# Altium PCB PCB_TKeyboard_2021-06-17.pcbdoc
Units mil, origin at the board's own origin, x right, y up, seen from the top; angles counter-clockwise.
Board outline 6275 x 6995 mil, 2 copper layers (Top Layer, Bottom Layer); 30 components, 31 nets, 91 pads, 11 vias.
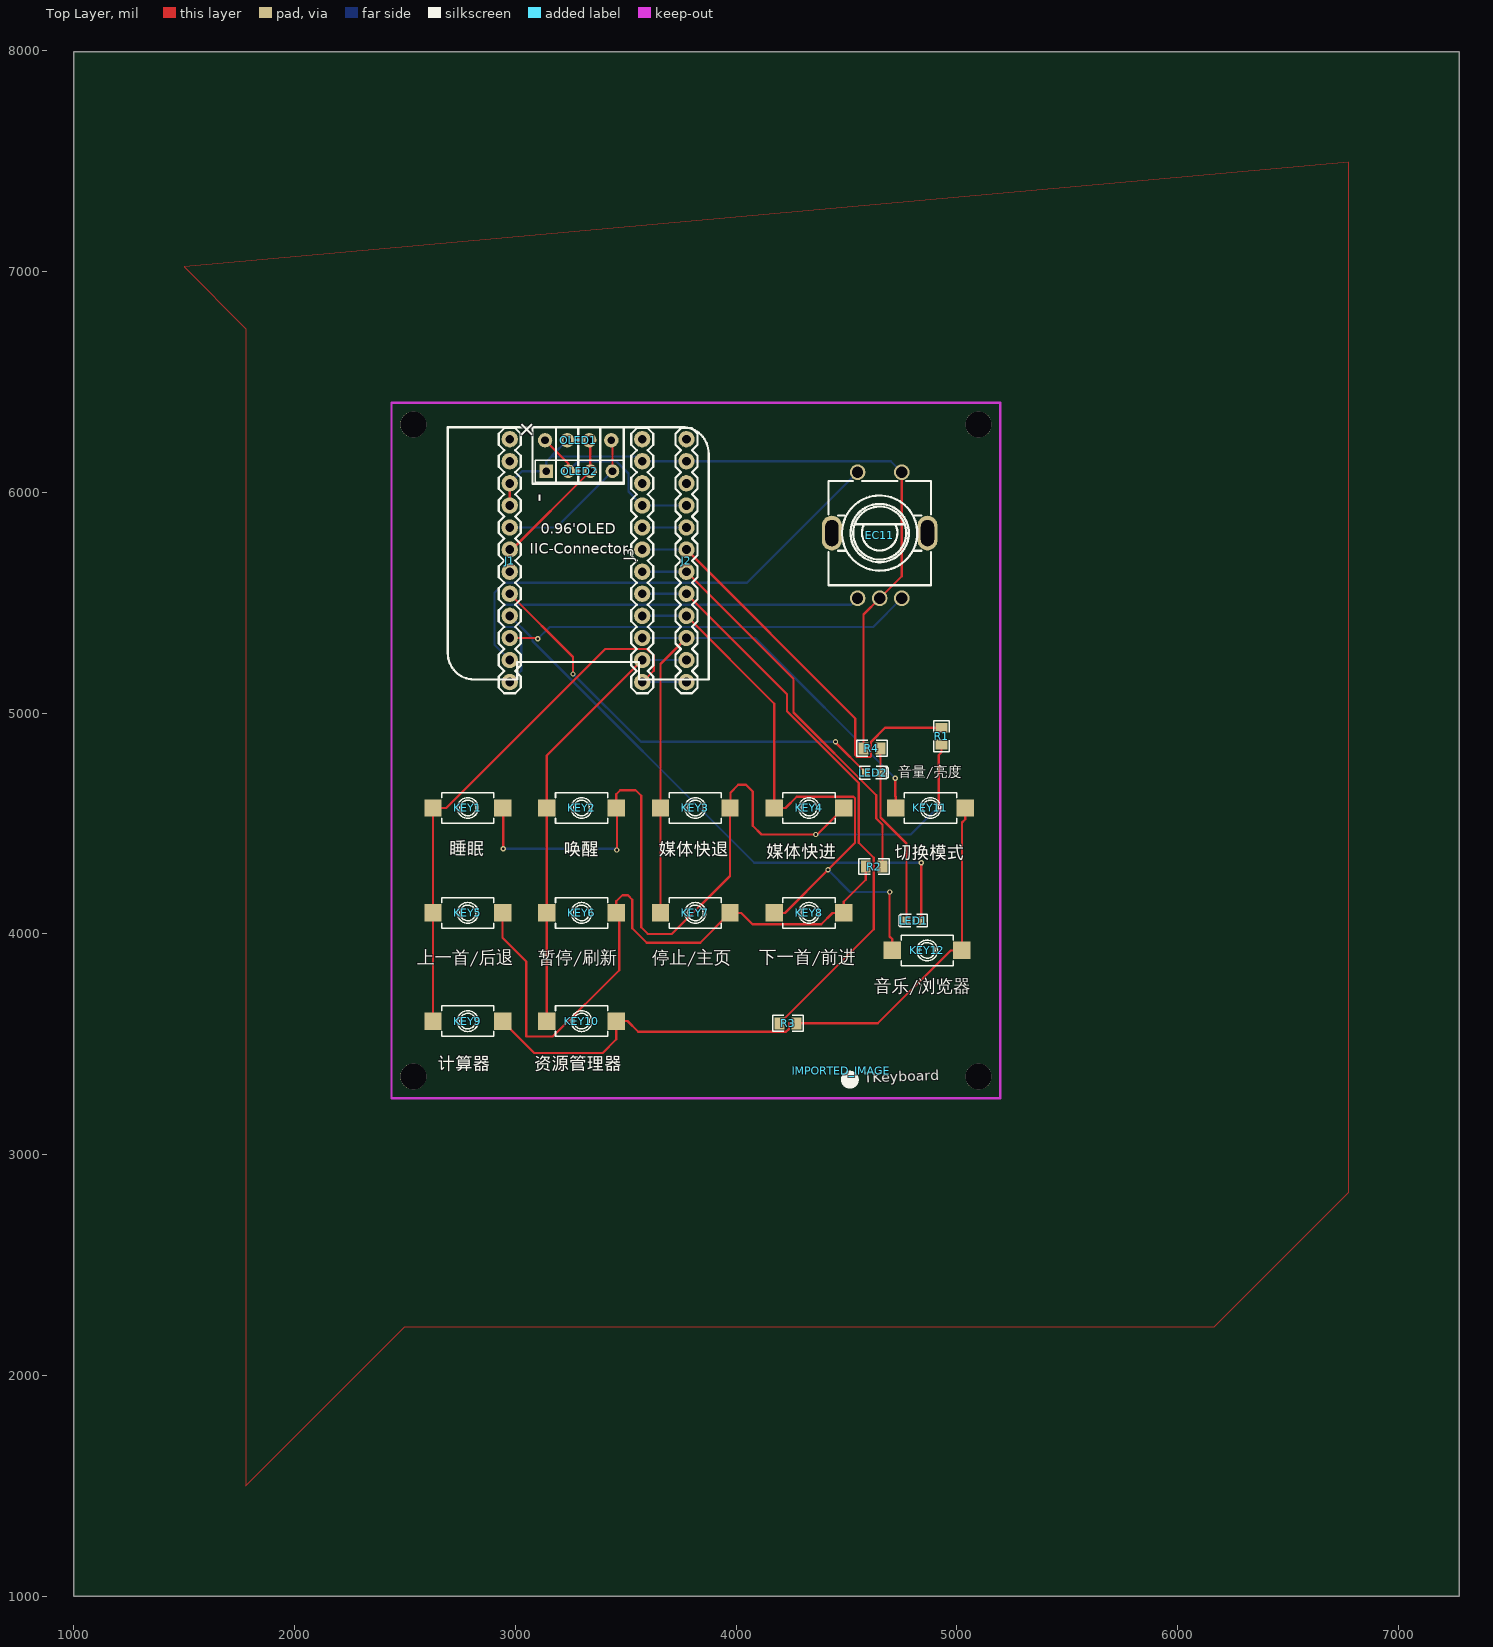
[diagram p0: Top Layer view]
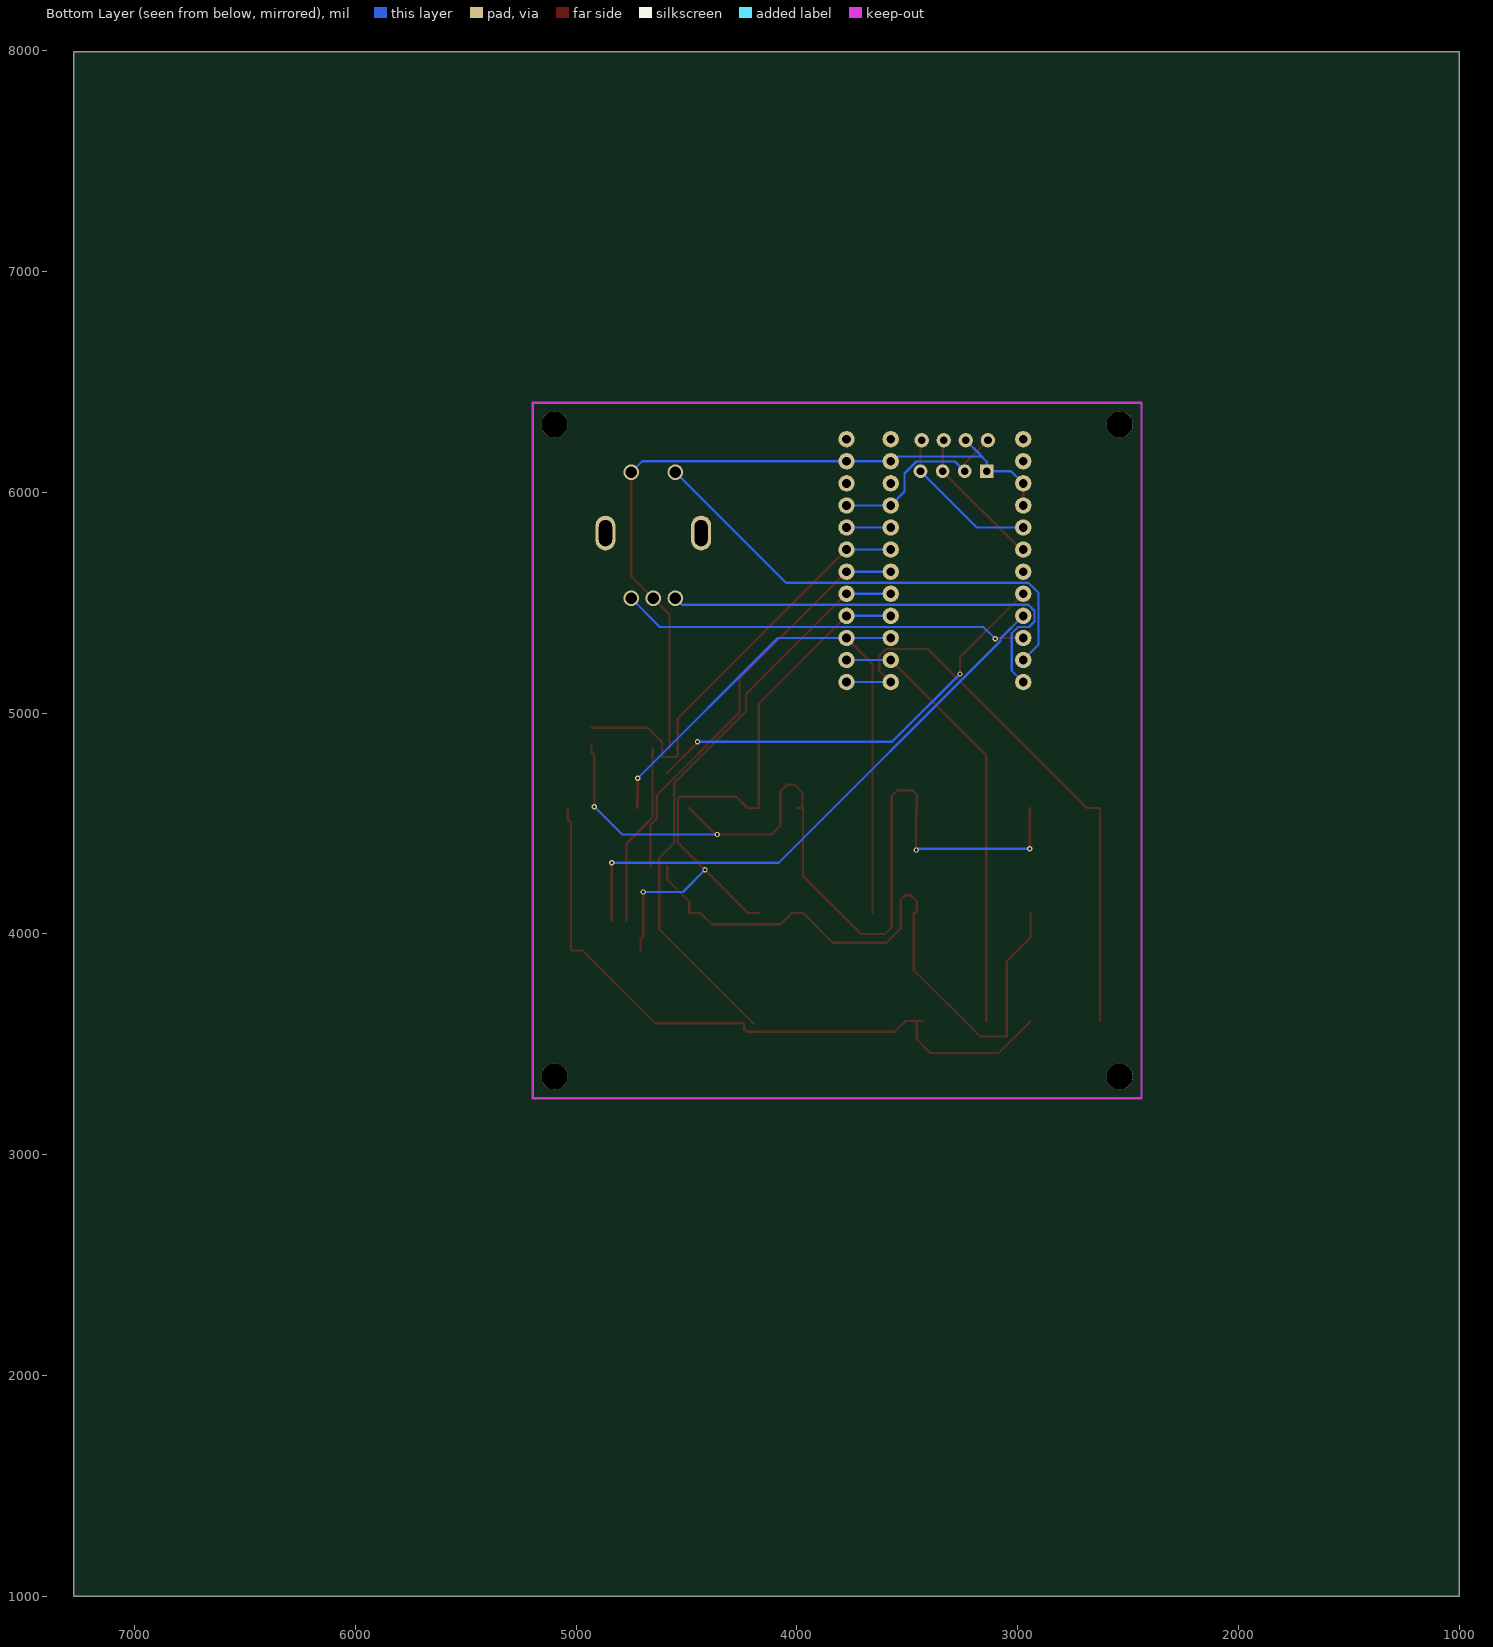
[diagram p1: Bottom Layer view, seen from below]

## Layer stack, top to bottom
Top Layer: signal copper (thickness not stored)
Dielectric: dielectric 12.6, FR-4, Dk 4.8
Bottom Layer: signal copper (thickness not stored)

## Board outline
7275,1000 1000,1000 1000,7995 7275,7995

## Components (designator, comment, footprint, x,y, rotation, side; value= is the part's Value field where it differs from the comment)
EC11 "EC11E152T409" SW-TH_EC11XXXXXXXX 4650,5805 r0 top
IMPORTED_IMAGE "IMPORTED_IMAGE" IMPORTED_IMAGE 4475.7,3379.3 r0 top
J1 "1X12" 1X12 2975,5740 r90 top
J2 "1X12" 1X12 3775,5740 r90 top
J3 "1X12" 1X12 3575,5740 r90 top
KEY1 "K2-3.6×6.1_SMD" KEY-SMD_2P-L6.0-W3.5-P8.00-L 2785,4570 r0 top
KEY2 "K2-3.6×6.1_SMD" KEY-SMD_2P-L6.0-W3.5-P8.00-L 3300,4570 r0 top
KEY3 "K2-3.6×6.1_SMD" KEY-SMD_2P-L6.0-W3.5-P8.00-L 3815,4570 r0 top
KEY4 "K2-3.6×6.1_SMD" KEY-SMD_2P-L6.0-W3.5-P8.00-L 4330,4570 r0 top
KEY5 "K2-3.6×6.1_SMD" KEY-SMD_2P-L6.0-W3.5-P8.00-L 2785,4095 r0 top
KEY6 "K2-3.6×6.1_SMD" KEY-SMD_2P-L6.0-W3.5-P8.00-L 3300,4095 r0 top
KEY7 "K2-3.6×6.1_SMD" KEY-SMD_2P-L6.0-W3.5-P8.00-L 3815,4095 r0 top
KEY8 "K2-3.6×6.1_SMD" KEY-SMD_2P-L6.0-W3.5-P8.00-L 4330,4095 r0 top
KEY9 "K2-3.6×6.1_SMD" KEY-SMD_2P-L6.0-W3.5-P8.00-L 2785,3605 r0 top
KEY10 "K2-3.6×6.1_SMD" KEY-SMD_2P-L6.0-W3.5-P8.00-L 3300,3605 r0 top
KEY11 "K2-3.6×6.1_SMD" KEY-SMD_2P-L6.0-W3.5-P8.00-L 4880,4570 r0 top
KEY12 "K2-3.6×6.1_SMD" KEY-SMD_2P-L6.0-W3.5-P8.00-L 4865,3925 r0 top
LED1 "LED-0603_R" LED0603_RED 4805,4060 r180 top
LED2 "LED-0603_R" LED0603_RED 4620,4730 r0 top
OLED1 "0.96OLED_4P" 0.96OLED_4P 3285,6235 r0 top
OLED2 "HDR-M-2.54_1x4" HDR-M-2.54_1X4 3290,6095 r0 top
R1 "1k" R0805 4930,4895 r90 top
R2 "1k" R0805 4625,4305 r0 top
R3 "1k" R0805 4235,3595 r180 top
R4 "1k" R0805 4615,4840 r180 top
? "" ? 3375,6833.85 r0 top
? "" ? 3275,6662.8 r0 top
? "" ? 2265.07,4830.2 r0 top
? "" ? 3820,3150 r0 top
? "" ? 2668.97,6355.78 r0 top

## Footprints (in the part's own frame and the unit in brackets; to place one, negate y for a bottom-side part, rotate by r counter-clockwise, add the part's x,y. Pads: shape width x height; smd on the part's side, far side on the other; paste and mask are expansions set on the pad)
0.96OLED_4P [mm]
  round 1.65 hole 0.89: 1(-3.81,-0.001) 2(-1.27,0.002) 3(1.27,0.002) 4(3.81,0.002)
  silkscreen extent -15,-27.5 15,1.5
1X12 [mil]
  round 74 hole 40: 1(-600,0) 2(-500,0) 3(-400,0) 4(-300,0) 5(-200,0) 6(-100,0) 7(0,0) 8(100,0) 9(200,0) 10(300,0) 11(400,0) 12(500,0)
  silkscreen extent -650,-50 550,50
HDR-M-2.54_1X4 [mil]
  rect 62x62 hole 35: 1(-150,0)
  round 62 hole 35: 2(-50,0) 3(50,0) 4(150,0)
  silkscreen extent -200,-50 200,50
IMPORTED_IMAGE [mil]
  silkscreen extent 0,-79 79,0
KEY-SMD_2P-L6.0-W3.5-P8.00-L [mm]
  rect 2x2 smd: 1(-4,0) 2(4,0)
  silkscreen extent -3,-1.75 3,1.75
LED0603_RED [mm]
  rect 0.9x1 smd: 1(-0.85,0) 2(0.85,0)
  silkscreen extent -1.54,-0.73 1.75,0.73
R0805 [mil]
  rect 44.59x54.21 smd: 1(-38.04,0) 2(38.04,0)
  silkscreen extent -69,-36 69,36
SW-TH_EC11XXXXXXXX [mm]
  oval 2.3x4 hole 1.5 slot 3 at 90 deg: 6(5.5,0.25) 7(-5.5,0.25)
  round 1.8 hole 1.3: A(-2.54,-7.25) B(2.54,-7.25) C(0,-7.25) D(-2.54,7.25) E(2.54,7.25)
  silkscreen extent -5.9,-5.75 5.9,6.25
? [mil]

## Free pads (board coordinates)
  round 118.11 hole 118.11 unplated: 0(2538.43,3353.82) 0(2538.43,6306.57) 0(5097.48,3353.82) 0(5097.48,6306.57)

## Via types
v1: diameter 24.02, hole 12.2, Top Layer to Bottom Layer, 11 vias

## Nets (pads, with @x,y where several pads share a name; then routed paths per layer and width w, separated by ;. In a path a pad name is that pad's centre, name@x,y a point inside that pad or via, vN(x,y) a via of type N, cw(c..) or ccw(c..) an arc to the next point about the centre after c; other vN are vias at no path point)
0: pad.0@5097.48,6306.57
4: J1.6
5: J1.5 LED2.1 | length 1993.7
  Top Layer w10: v1(4450,4870) 4450,4866.53 LED2.1
  Top Layer w10.24: J1.5 3261.7,5253.3 v1(3261.7,5177.1)
  Bottom Layer w10.24: v1(3261.7,5177.1) 3568.8,4870 v1(4450,4870)
6: J1.4 LED1.1 | length 2595
  Top Layer w10.24: LED1.1 v1(4838.5,4322)
  Bottom Layer w10.24: J1.4 3077.9,5337.1 3077.9,5326.1 4082,4322 v1(4838.5,4322)
10: J2.1 J3.1 KEY1.1 KEY5.1 KEY9.1 | length 2615.7
  Top Layer w10.24: KEY9.1 KEY5.1 KEY1.1 2678.4,4570 2687.9,4570 3407.9,5290 3596,5290 3626.5,5259.5 3626.5,5191.5 J3.1
  Bottom Layer w10.24: J3.1 J2.1
14: J2.3 J3.3 KEY3.1 KEY7.1 KEY11.1 | length 2837.7
  Top Layer w10.24: KEY7.1 KEY3.1 3657.5,5222.5 J2.3 ; v1(4720,4705) 4720,4623.4 4722.5,4620.9 KEY11.1
  Bottom Layer w10.24: J3.3 J2.3 4085,5340 v1(4720,4705)
15: J2.4 J3.4 KEY4.1 KEY8.1 KEY12.1 | length 2915.3
  Top Layer w10.24: J2.4 4172.5,5042.5 KEY4.1 4223.4,4570 4274.3,4620.9 4531.6,4620.9 4538.4,4614.1 4538.4,4412.1 v1(4416.1,4289.8) 4223.4,4097.1 4223.4,4095 KEY8.1 ; v1(4695,4190) 4695,3988.4 4707.5,3975.9 KEY12.1
  Bottom Layer w10.24: J3.4 J2.4 ; v1(4416.1,4289.8) 4515.9,4190 v1(4695,4190)
16: J2.2 J3.2 KEY2.1 KEY6.1 KEY10.1 | length 2014.1
  Top Layer w10.24: KEY10.1 KEY6.1 KEY2.1 3142.5,4807.5 J3.2
  Bottom Layer w10.24: J3.2 J2.2
18: J2.5 J3.5 R3.2 | length 2672.5
  Top Layer w10.24: J2.5 4230,5085 4230,5008.6 4555,4683.6 4555,4413 4622.8,4345.2 4622.8,4020.9 R3.2
  Bottom Layer w10.24: J3.5 J2.5
19: J2.6 J3.6 R2.2 | length 1902.9
  Top Layer w10.24: J2.6 4260,5155 4260,5002.2 4634.7,4627.5 4634.7,4522.7 4663.1,4494.3 R2.2@4663.1,4305
  Bottom Layer w10.24: J3.6 J2.6
20: J2.7 J3.7 R1.2 | length 1933.5
  Top Layer w10.24: J2.7 4539.3,4975.7 4539.3,4809.7 4547.7,4801.4 4607.8,4801.4 4610.8,4804.4 4610.8,4869.3 4674.5,4933 R1.2
  Bottom Layer w10.24: J3.7 J2.7
21: J2.8 J3.8 | length 200
  Bottom Layer w10.24: J3.8 J2.8
CLK: EC11.B J1.3 | length 1852.9
  Top Layer w10.24: J1.3 3097.3,5340 v1(3101.5,5335.8)
  Bottom Layer w10.24: v1(3101.5,5335.8) 3155.6,5390 4620.4,5390 EC11.B
DT: EC11.A J1.1 | length 2065
  Bottom Layer w10.24: J1.1 3026.5,5191.5 3026.5,5361 2997.5,5390 2948.6,5390 2923.7,5414.9 2923.7,5462.5 2951.2,5490 4520.5,5490 EC11.A
EC11_6: EC11.6
EC11_7: EC11.7
GND: EC11.C EC11.E J1.9 J1.10 J2.11 J3.11 OLED1.2 OLED2.1 R4.2 | length 3401.9
  Top Layer w10.24: J1.9 J1.10 ; R4.2 4577,5446.5 EC11.C 4750,5619.6 EC11.E
  Bottom Layer w10.24: J1.10 3030,6095 OLED2.1 3140,6137.5 3168.8,6166.2 ; OLED1.2@3235,6235 3168.7,6168.8 3168.7,6166.3 3168.8,6166.2 ; EC11.E 4700.4,6140 J2.11 J3.11 3553.5,6161.5 3173.5,6161.5 3168.8,6166.2
J1_11: J1.11
J1_12: J1.12
J2_10: J2.10
J2_12: J2.12
J3_10: J3.10
J3_12: J3.12
KEY1_2: KEY1.2 KEY2.2 KEY3.2 KEY4.2 R1.1 | length 4290.8
  Top Layer w10: v1(3460,4380) 3460,4567.48 KEY2.2 3457.48,4632.48 3475,4650 3545,4650 3570,4625 3570,4030 3600,4000 3710,4000 3972.48,4262.48 KEY3.2 3975,4572.52 3975,4640 4010,4675 4045,4675 4075,4645 4075,4490 4115,4450 v1(4360,4450) 4367.48,4450 KEY4.2
  Top Layer w10.24: KEY1.2 2945,4567.5 v1(2945,4385) ; KEY2.2@3457.5,4544.6 KEY2.2 ; KEY3.2 KEY3.2@3997.9,4570 ; v1(4916.9,4576.2) 4916.9,4810.1 4930,4823.1 R1.1@4930,4856.9
  Bottom Layer w10.24: v1(2945,4385) 3455,4385 v1(3460,4380) ; v1(4360,4450) 4790.7,4450 v1(4916.9,4576.2)
KEY5_2: KEY5.2 KEY6.2 KEY7.2 KEY8.2 R2.1 | length 3029.9
  Top Layer w10: KEY6.2 3457.48,4147.48 3485,4175 3510,4175 3530,4155 3530,4025 3595,3960 3837.48,3960 KEY7.2
  Top Layer w10.24: KEY5.2 2942.5,4044.1 2942.5,3982.5 3050,3875 3050,3535 3169.8,3535 3470.2,3835.4 3470.2,4095 KEY6.2 ; KEY7.2 4023.4,4095 4074.2,4044.1 4385.7,4044.1 4436.6,4095 KEY8.2 4487.5,4120.4 4487.5,4145.9 4587,4245.4 R2.1
KEY9_2: KEY9.2 KEY10.2 KEY11.2 KEY12.2 R3.1 | length 3112.9
  Top Layer w10: KEY9.2 3087.48,3460 3395,3460 3457.48,3522.48 KEY10.2
  Top Layer w10.24: KEY10.2@3432,3605 KEY10.2 3508.4,3605 3557,3556.4 4226,3556.4 4239.2,3569.6 4239.2,3595 4273.1,3595 4641.6,3595 4971.6,3925 KEY12.2 5022.5,4504.1 5037.5,4519.1 KEY11.2
LED1_2: LED1.2 LED2.2 R4.1 | length 829
  Top Layer w10.24: R4.1@4653.1,4840 4653.1,4801.4 4653.5,4801 LED2.2 4653.5,4527.4 4771.5,4409.3 LED1.2
SCL: J1.7 OLED1.3 OLED2.3 | length 654.1
  Top Layer w10.24: J1.7 2985,5740 OLED2.3 3340,6230 OLED1.3@3335,6235
SDA: J1.8 OLED1.4 OLED2.4 | length 712.7
  Top Layer w10.24: OLED1.4@3435,6235 3440,6230 OLED2.4
  Bottom Layer w10.24: J1.8 3185,5840 OLED2.4
SW: EC11.D J1.2 | length 2203.2
  Bottom Layer w10.24: J1.2 2906.1,5308.9 2906.1,5544.7 2951.3,5590 4049.6,5590 EC11.D
VCC: J2.9 J3.9 OLED1.1 OLED2.2 | length 866.6
  Top Layer w10.24: OLED1.1@3135,6234.9 3240,6129.9 OLED2.2
  Bottom Layer w10.24: OLED2.2 3283.6,6138.6 3458.1,6138.6 3512.2,6084.5 3512.2,6002.8 J3.9 J2.9

## Polygon pours and split planes (outlines as drawn)
GND on Top Layer (solid): 1500,7020 1780,6740 1780,1500 2500,2220 6165,2220 6775,2830 6775,7495

## Silkscreen, mask and mechanical layers (free items; w line width, h text height)
Top Overlay:
  text "+" at 3061.72,6338.28 h80 r225
  text "-" at 3140,5955 h80 r90
  text "音量/亮度" at 4735,4695 h78.74
  text "睡眠" at 2700,4340 h98.42 r359
  text "唤醒" at 3220,4335 h98.42
  text "媒体快退" at 3650,4335 h98.42
  text "媒体快进" at 4135.45,4325 h98.42
  text "切换模式" at 4715,4320 h98.42
  text "下一首/前进" at 4105,3845.7 h98.42
  text "上一首/后退" at 2555,3845 h98.42
  text "暂停/刷新" at 3105,3845 h98.42
  text "停止/主页" at 3620,3845 h98.42
  text "音乐/浏览器" at 4625,3715 h98.42
  text "计算器" at 2650,3365 h98.42
  text "资源管理器" at 3085,3364.6 h98.42
  text "TKeyboard" at 4580,3310 h78.74 r2
Document:
  circle w10: c4620,5805 r590.55

## Text inside footprints (layer, text, board x,y; h text height)
OLED1: Top Overlay "IIC-Connector" at 3065,5721.38 h47.24; Top Overlay "0.96'OLED" at 3115,5811.38 h47.24